# Altium PCB Устройство_Проверки_DI_DO_АКРОС_v1.0.PcbDoc
Units mm, origin at the board's own origin, x right, y up, seen from the top; angles counter-clockwise.
Board outline 74.8 x 46.2 mm, 2 copper layers (Top Layer, Bottom Layer), stack 1.571 mm thick; 24 components, 18 nets, 93 pads, 111 vias.
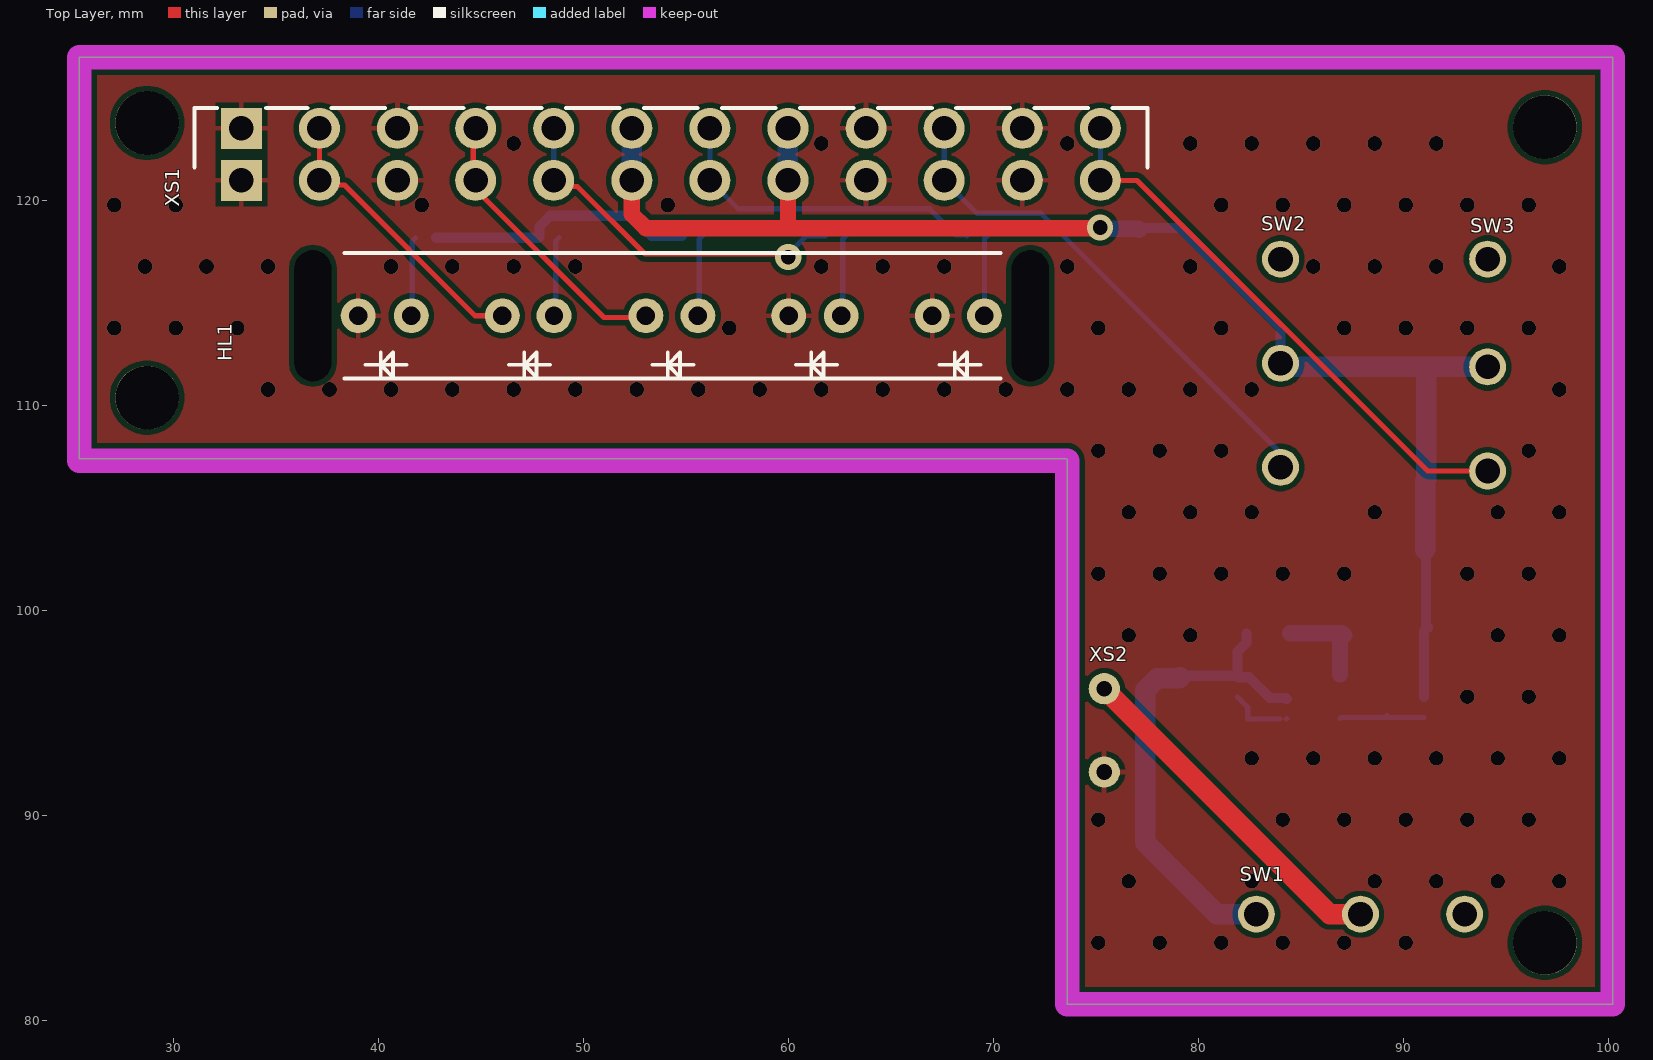
[diagram p0: Top Layer view]
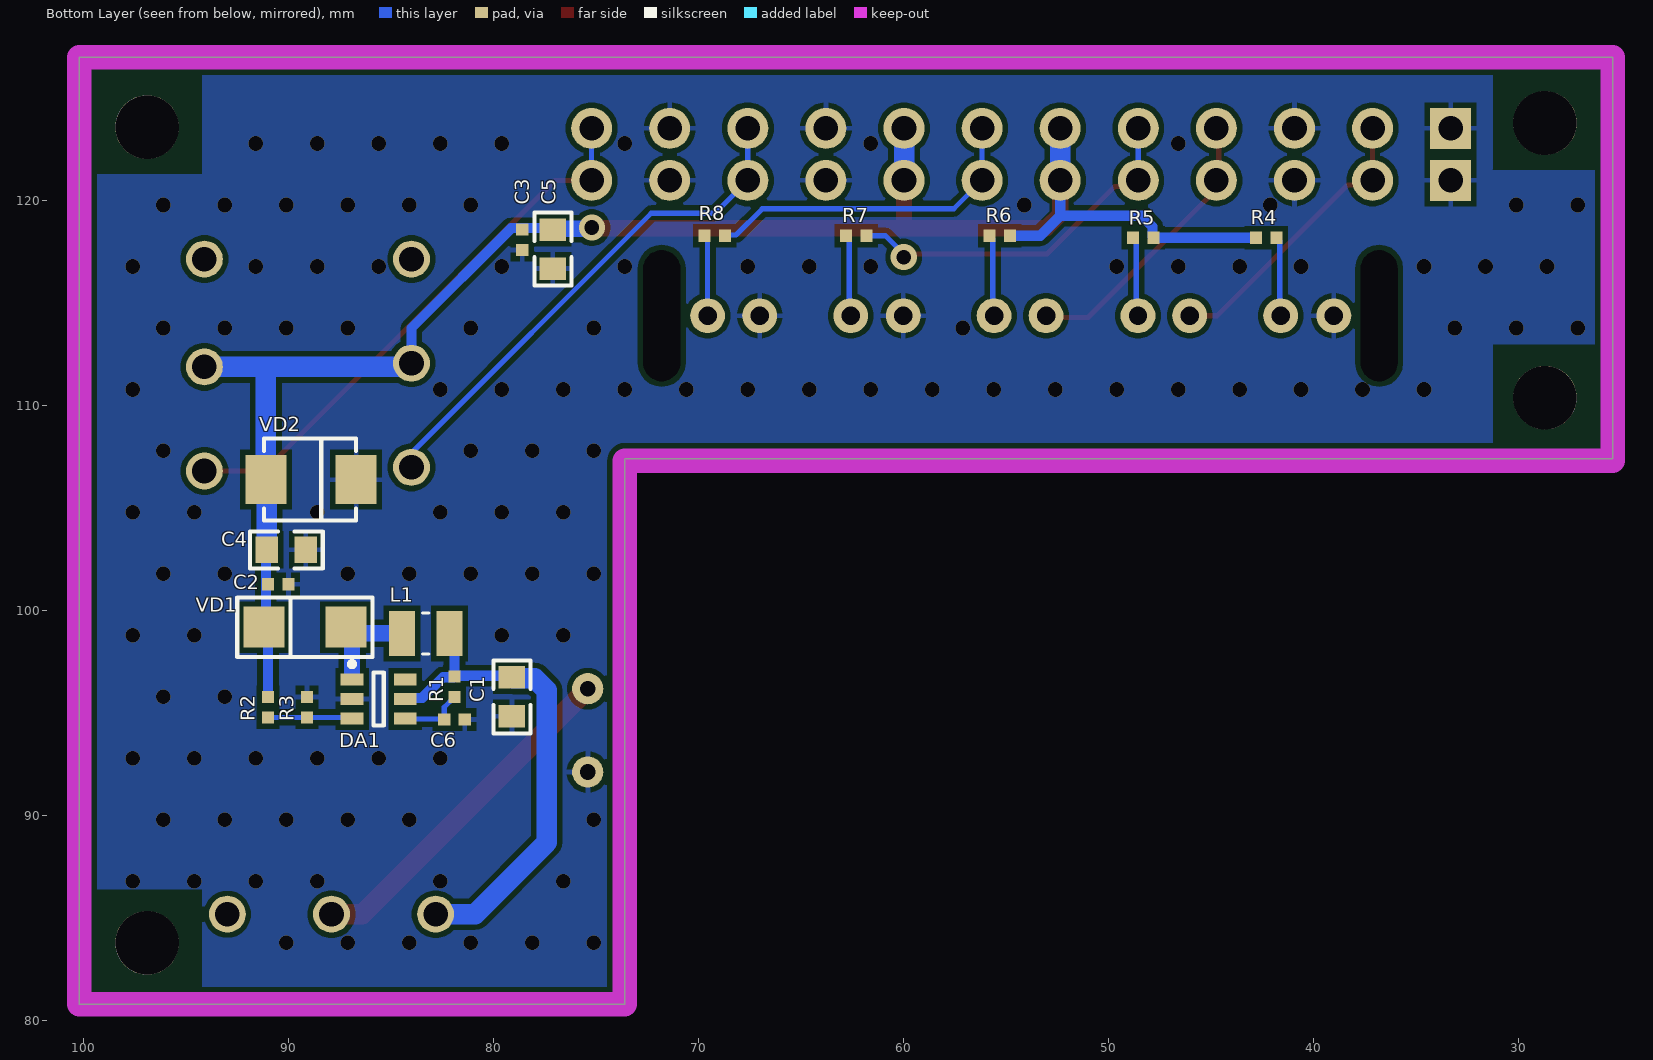
[diagram p1: Bottom Layer view, seen from below]
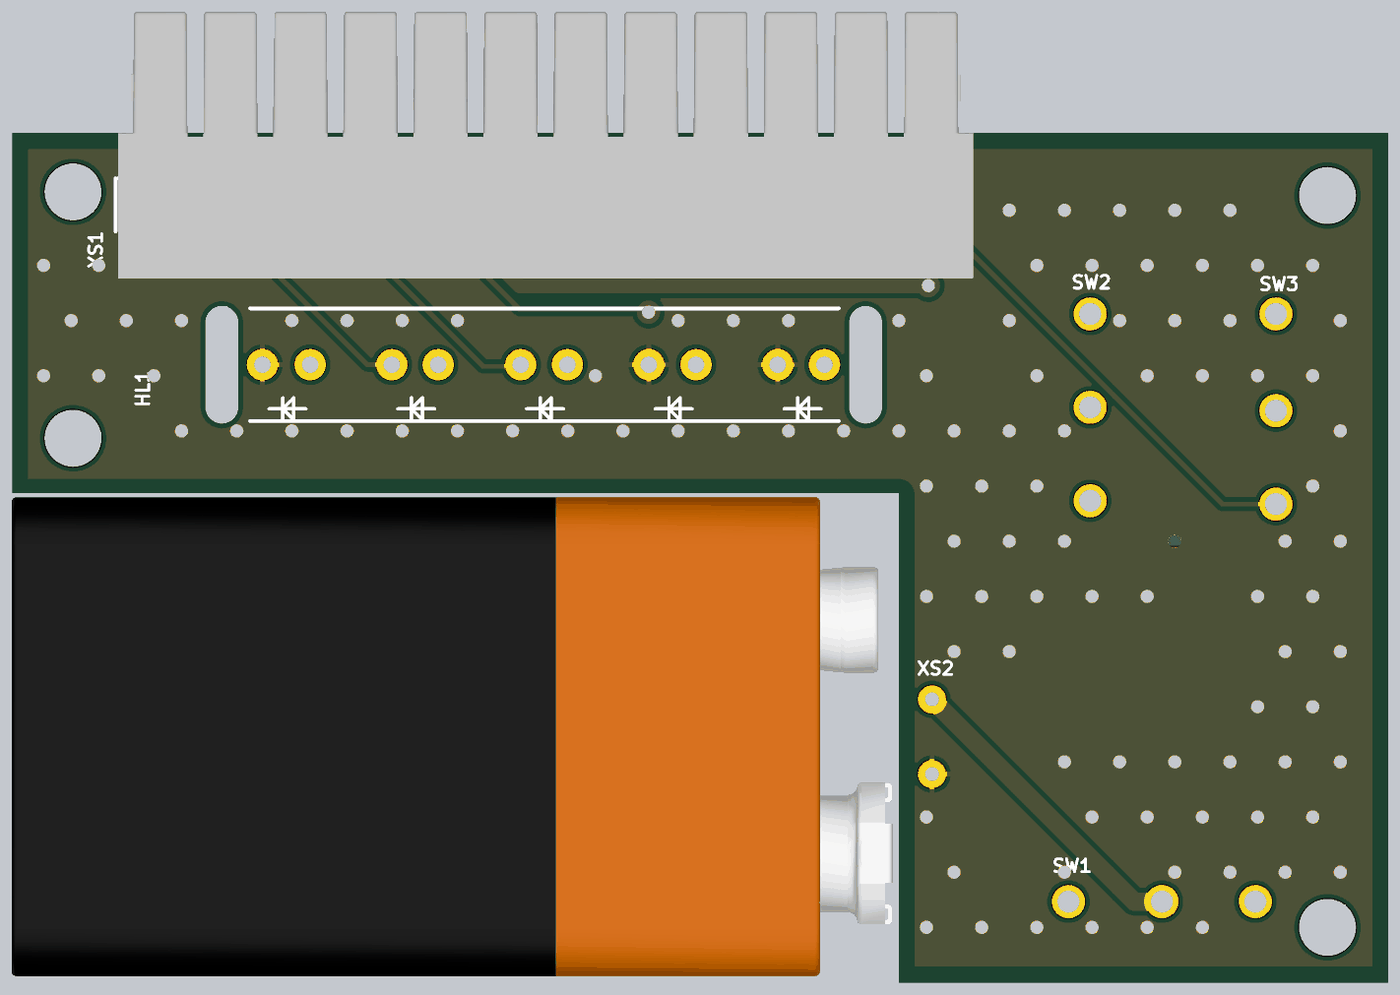
[diagram p2: 3D render of the assembled board from above, using the file's embedded part models]
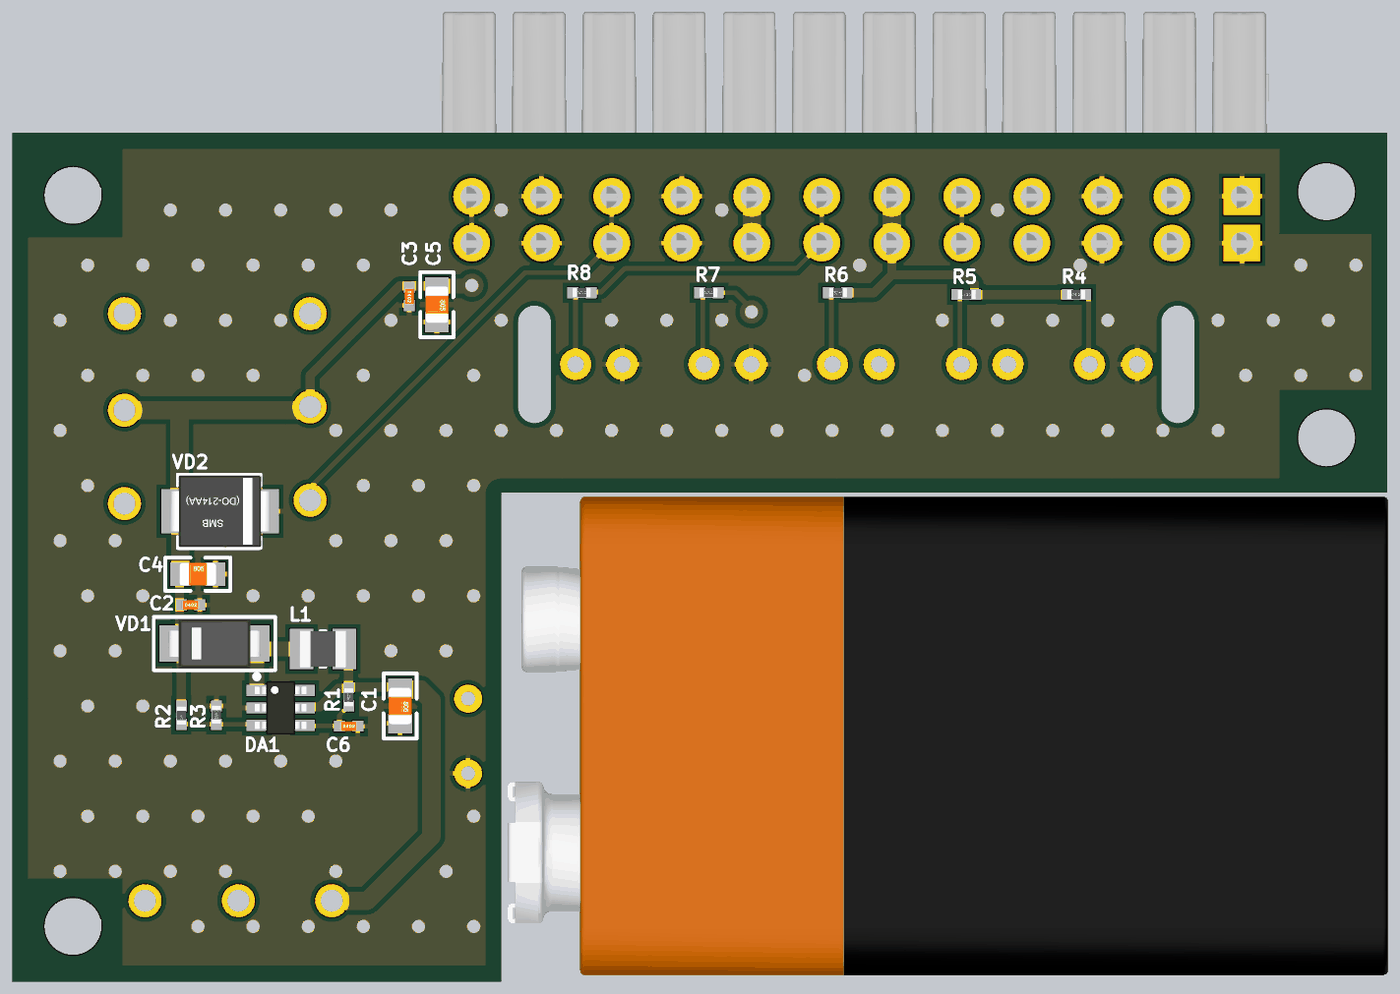
[diagram p3: 3D render of the assembled board from below, using the file's embedded part models]

## Layer stack, top to bottom
Top Solder: solder mask 0.0102, Solder Resist, Dk 3.5
Top Layer: signal copper 0.0356
Dielectric 1: dielectric 1.5, FR-4, Dk 4.8
Bottom Layer: signal copper 0.0356
Bottom Solder: solder mask 0.0102, Solder Resist, Dk 3.5

## Board outline
25.4,107.432 73.6,107.432 73.6,80.8 73.7,80.8 100.2,80.8 100.2,127 25.4,127

## Design rules (kind name [scope] priority, off if disabled: settings)
Clearance Clearance_2 [All] p1: gap=0.254 ignorepadtopadclearanceinfootprint=FALSE except(0: Arc-Hole Track-Hole SMDPad-Hole THPad-Hole Via-Hole Fill-Hole Poly-Hole Region-Hole Text-Hole)
Clearance Clearance_1 [All] p2: gap=0.254 ignorepadtopadclearanceinfootprint=FALSE except(0: Arc-Hole Track-Hole SMDPad-Hole THPad-Hole Via-Hole Fill-Hole Poly-Hole Region-Hole Text-Hole)
Clearance [All] p3: gap=0.254 ignorepadtopadclearanceinfootprint=FALSE except(0: Arc-Hole Track-Hole SMDPad-Hole THPad-Hole Via-Hole Fill-Hole Poly-Hole Region-Hole Text-Hole)
Height [All] p1: minheight=0 maxheight=35.4 prefheight=12.7
HoleSize [All] p1: absolutevalues=TRUE maxlimit=13.1 minlimit=0.3 maxpercent=80.000 minpercent=20.000
MinimumSolderMaskSliver [All] p1: minsoldermaskwidth=0.1
PolygonConnect [All] p1: thpad.connectstyle=Relief thpad.reliefconductorwidth=0.254 thpad.reliefentries=4 thpad.polygonreliefangle="90 Angle" thpad.airgapwidth=0.254 smdpad.connectstyle=Relief smdpad.reliefconductorwidth=0.254 smdpad.reliefentries=4 smdpad.polygonreliefangle="90 Angle" smdpad.airgapwidth=0.254 via.connectstyle=Direct via.reliefconductorwidth=0.254 via.reliefentries=4 via.polygonreliefangle="90 Angle" via.airgapwidth=0.254
RoutingVias [All] p1: holewidth=0.711 width=1.27 viastyle="Through Hole" minholewidth=0.711 minwidth=1.27 maxholewidth=0.711 maxwidth=1.27
SolderMaskExpansion [All] p1: expansion=0.065 istentingtop=FALSE
UnRoutedNet [All] p1: checkbadconnections=TRUE
ViasUnderSMD [All] p1: allowed=FALSE
Width [All] p1: maxlimit=1 minlimit=0.254 preferedwidth=0.254 minimp=50.000000 maximp=50.000000 favimp=50.000000
26 further rules are at their usual default settings.

## Components (designator, comment, footprint, x,y, rotation, side; value= is the part's Value field where it differs from the comment)
C1 "10мк" "CAP: 0805" 79.1,95.8 r270 bottom
C2 "0,1мк" "CAP: 0402" 90.5,101.3 r180 bottom
C3 "0,1мк" "CAP: 0402" 78.6,118.1 r270 bottom
C4 "10мк" "CAP: 0805" 90.104,102.973 r180 bottom
C5 "10мк" "CAP: 0805" 77.1,117.65 r270 bottom
C6 "0,1мк" "CAP: 0402" 81.9,94.7 r180 bottom
DA1 "BL8042DCB6TR" SOT23-6 85.6,95.7 r180 bottom
HL1 "HLA" L-914GDT 39,114.4 r0 top
L1 "CVM252009-4R7M" "IND: 1008" 83.3,98.9 r180 bottom
R1 "100к" "RES: 0402" 81.9,96.3 r90 bottom
R2 "75к" "RES: 0402" 91,95.3 r90 bottom
R3 "3к" "RES: 0402" 89.1,95.3 r270 bottom
R4 "1.5k" "RES: 0402" 42.3,118.2 r180 bottom
R5 "1.5k" "RES: 0402" 48.3,118.2 r0 bottom
R6 "1.5k" "RES: 0402" 55.3,118.3 r0 bottom
R7 "1.5k" "RES: 0402" 62.3,118.3 r180 bottom
R8 "1.5k" "RES: 0402" 69.2,118.3 r180 bottom
SW1 "Button-kcd11-102" "BUT: kcd11-102"#1 92.98,85.2 r180 top
SW2 "Button-kcd11-102" "BUT: kcd11-102"#1 84,117.16 r270 top
SW3 "Button-kcd11-102" "BUT: kcd11-102"#2 94.1,116.98 r270 top
VD1 "15MQ040" "DIODE: SMA" 89.2,99.2 r0 bottom
VD2 "SMBJ24CA" "DIODE: SMB" 88.9,106.4 r180 bottom
XS1 "15EDGA-3.81-12P" "CON: 15EDGA-3.81-12P" 33.3,123.54 r0 top
XS2 "XS?" "BAT: Krona" 75.527,94.168 r270 top

## Footprints (in the part's own frame and the unit in brackets; to place one, negate y for a bottom-side part, rotate by r counter-clockwise, add the part's x,y. Pads: shape width x height; smd on the part's side, far side on the other; paste and mask are expansions set on the pad)
"BAT: Krona" [mil]
  round 60 hole 30: 1(-80,-5) 2(80,-5)
  body extent -513,-1975 513,-90, height 531
"BUT: kcd11-102"#1 [mm]
  round 1.8 hole 1.2: 1(5.08,0) 2(0,0) 3(10.16,0)
"BUT: kcd11-102"#2 [mm]
  round 1.8 hole 1.2: 1(5.08,0) 2(-0.18,0) 3(10.16,0)
"CAP: 0402" [mm]
  rect 0.6x0.6 smd mask+0.065: 1(-0.5,0) 2(0.5,0)
  body extent -0.51,-0.25 0.51,0.25, height 0.51
"CAP: 0805" [mm]
  rect 1.1x1.3 smd mask+0.065: 1(-0.95,0) 2(0.95,0)
  silkscreen extent -1.78,-0.9 1.78,0.9, body extent -1,-0.62 1,0.63, height 0.78
"CON: 15EDGA-3.81-12P" [mm]
  rect 2x2 hole 1.2 mask+0.1: 1(0,-2.54) 1(0,0)
  round 2 hole 1.2 mask+0.1: 2(3.81,-2.54) 2(3.81,0) 3(7.62,-2.54) 3(7.62,0) 4(11.43,-2.54) 4(11.43,0) 5(15.24,-2.54) 5(15.24,0) 6(19.05,-2.54) 6(19.05,0) 7(22.86,-2.54) 7(22.86,0) 8(26.67,-2.54) 8(26.67,0) 9(30.48,-2.54) 9(30.48,0) 10(34.29,-2.54) 10(34.29,0) 11(38.1,-2.54) 11(38.1,0) 12(41.91,-2.54) 12(41.91,0)
  silkscreen extent -2.28,-1.9 44.2,1, body extent -2.16,-4.44 44.35,10.05, height 7.18
"DIODE: SMA" [mm]
  rect 2x2 smd mask+0.065: 1(-2,0) 2(2,0)
  round 0.5 on Mech1: ""(2,0.9)
  silkscreen extent -3.3,-1.45 3.3,1.45, body extent -2.5,-1.35 2.5,1.35, height 2.28
"DIODE: SMB" [mm]
  rect 2x2.4 smd mask+0.065: 1(-2.2,0) 2(2.2,0)
  silkscreen extent -2.3,-2 2.2,2, body extent -2.75,-1.95 2.75,1.95, height 2.45
"IND: 1008" [mm] "Chip Inductor, 2-Leads, Body 2,50x2,00mm, IPC Medium Density"
  rect 1.27x2.2 smd: 1(-1.165,0) 2(1.165,0)
  silkscreen extent -0.15,-1 0.15,1, body extent -1.27,-1.02 1.27,1.02, height 1.1
L-914GDT [mm]
  rect 0x0 hole 1.8 slot 6.4 at 90 deg unplated mask+0.05: 0(-2.209,-0.002) 0(32.791,-0.002)
  round 1.7 hole 0.9 mask+0.05: 1(0,0) 2(2.593,0) 3(7.034,0) 4(9.553,0) 5(14.04,0) 6(16.577,0) 7(21.002,0) 8(23.571,0) 9(28.013,0) 10(30.553,0)
  silkscreen extent -0.67,-3.06 31.33,3.06, body extent -5.57,-2.75 36.13,2.55, height 16.3
"RES: 0402" [mm]
  rect 0.6x0.6 smd mask+0.065: 1(-0.5,0) 2(0.5,0)
  body extent -0.52,-0.25 0.48,0.25, height 0.34
SOT23-6 [mm] "pitch 0.95 mm"
  rect 1.1x0.6 smd: 1(-1.3,0.95) 2(-1.3,0) 3(-1.3,-0.95) 4(1.3,-0.95) 5(1.3,0) 6(1.3,0.95)
  round 0.5 on Mech1: ""(-1,1.1)
  silkscreen extent -1.43,-1.3 0.25,1.82, body extent -1.4,-1.45 1.4,1.45, height 1.45

## Part data
C1 C4 C5: library part Ceramic_0805, Наименование="0805 X5R 16В 10 мкФ ±10%", Примечание=SMD
C2 C3 C6: library part Ceramic_0402, Наименование="0402 X7R 25В 0,1 мкФ ±10%", Примечание=SMD
DA1: "Boost converter", Наименование=BL8032CB6TR, Примечание=SMD
HL1: library part L-914GDT
L1: library part CVM252009, Наименование=CVM252009-4R7M, Примечание=SMD
R1 R2 R3 R4 R5 R6 R7 R8: library part Resistor_0402, Наименование="0402 100 кОм ±1%", Примечание=SMD
VD1: library part Schottky_single, Наименование=MBR0520, Примечание=SMD
VD2: library part TVS_single, Наименование=1N4148, Примечание=SMD
XS1: library part "CONNECTOR-12 - 3,81mm"
XS2: library part Connector_Krona

## Free pads (board coordinates)
  round 3.1 hole 3.1 unplated: 2(28.7,110.4) 2(28.7,123.8) 2(96.9,83.8) 2(96.9,123.6)

## Via types
v1: diameter 0.711, hole 0.711, Top Layer to Bottom Layer, tented both sides, 109 vias
v2: diameter 1.27, hole 0.711, Top Layer to Bottom Layer, tented both sides, 2 vias

## Nets (pads, with @x,y where several pads share a name; then routed paths per layer and width w, separated by ;. In a path a pad name is that pad's centre, name@x,y a point inside that pad or via, vN(x,y) a via of type N, cw(c..) or ccw(c..) an arc to the next point about the centre after c; other vN are vias at no path point)
+9V: SW1.1 XS2.1 | length 17.1
  Top Layer w1: XS2.1 86.4,85.2 SW1.1
+15V: C2.1 C3.1 C4.1 C5.1 R2.2 R4.1 R5.1 R6.1 SW2.1 SW3.1 VD1.2 VD2.1 XS1.6 XS1.8 | length 86.3
  Top Layer w0.254: 59.97,118.673 60,118.643
  Top Layer w0.8: XS1.6@52.35,121 52.35,119.35 53.027,118.673 59.97,118.673 ; XS1.8@59.97,121 59.97,118.673 ; v2@75.2,118.673 59.97,118.673 ; SW2.1 SW2.1@84,112.3
  Bottom Layer w0.5: R4.1 R5.1 47.85,118.25 47.85,118.75 48.374,119.274 52.35,119.274 ; XS1.6@52.35,121 52.35,119.274 ; R6.1 53.324,118.3 52.35,119.274 ; C5.1@77.1,118.673 79.127,118.673 84,113.8 SW2.1 ; R2.2 91,99 VD1.2 ; VD1.2@91.1,99.3 C2.1@91.1,101.3 ; C2.1@91.1,101.35 C4.1@91.1,103
  Bottom Layer w0.8: v2(75.2,118.7) 75.25,118.65 77.05,118.65 C5.1
  Bottom Layer w1: XS1.6@52.35,121 XS1.6@52.35,123.54 ; XS1.8@59.97,121 XS1.8@59.97,123.54 ; SW2.1@83.7,111.9 91.1,111.9 ; C4.1 VD2.1@91.054,106.354 ; VD2.1 91.1,111.9 ; SW3.1 91.1,111.9
DI1: SW3.3 XS1.12 | length 27.3
  Top Layer w0.254: XS1.12@75.21,121 77,121 91.18,106.82 SW3.3
  Bottom Layer w0.254: XS1.12@75.21,121 XS1.12@75.21,123.54
DI2: SW2.3 XS1.10 | length 24.3
  Bottom Layer w0.254: XS1.10@67.59,123.54 67.59,121 69.19,119.4 72.3,119.4 SW2.3@83.9,107.8
DO1: R8.2 XS1.7 | length 16.2
  Bottom Layer w0.254: XS1.7@56.16,123.54 56.16,121 57.541,119.619 66.881,119.619 68.168,118.332 68.668,118.332 R8.2
DO2: R7.2 XS1.5 | length 17.9
  Top Layer w0.254: XS1.5@48.54,121 48.833,120.707 49.693,120.707 52.989,117.411 59.826,117.411 v2(59.983,117.254)
  Bottom Layer w0.254: XS1.5@48.54,121 XS1.5@48.54,123.54 ; v2(59.983,117.254) 59.983,117.411 60.872,118.3 R7.2
DO3: HL1.5 XS1.4 | length 13.4
  Top Layer w0.254: XS1.4@44.618,123.263 44.618,121.982 XS1.4@45.165,121.435 ; XS1.4@44.73,121 44.73,120.57 50.99,114.31 52.95,114.31 HL1.5
DO4: HL1.3 XS1.2 | length 14.5
  Top Layer w0.254: XS1.2@37.11,123.54 37.11,121 37.338,120.772 38.328,120.772 44.7,114.4 45.656,114.4 HL1.3@46.131,113.926
GND: C1.2 C2.2 C3.2 C4.2 C5.2 C6.2 DA1.2 HL1.1 HL1.7 HL1.9 R3.1 VD2.2 XS1.1 XS1.3 XS1.9 XS1.11 XS2.2
  other v1: 75.1,83.8 78.1,83.8 81.1,83.8 84.1,83.8 87.1,83.8 90.1,83.8 76.6,86.8 82.6,86.8 88.6,86.8 91.6,86.8 94.6,86.8 97.6,86.8 75.1,89.8 84.1,89.8 87.1,89.8 90.1,89.8 93.1,89.8 96.1,89.8 82.6,92.8 85.6,92.8 88.6,92.8 91.6,92.8 94.6,92.8 97.6,92.8 93.1,95.8 96.1,95.8 76.6,98.8 79.6,98.8 94.6,98.8 97.6,98.8 75.1,101.8 78.1,101.8 81.1,101.8 84.1,101.8 87.1,101.8 93.1,101.8 96.1,101.8 76.6,104.8 79.6,104.8 82.6,104.8 88.6,104.8 94.6,104.8 97.6,104.8 75.1,107.8 78.1,107.8 81.1,107.8 96.1,107.8 34.6,110.8 37.6,110.8 40.6,110.8 43.6,110.8 46.6,110.8 49.6,110.8 52.6,110.8 55.6,110.8 58.6,110.8 61.6,110.8 64.6,110.8 67.6,110.8 70.6,110.8 73.6,110.8 76.6,110.8 79.6,110.8 82.6,110.8 97.6,110.8 27.1,113.8 30.1,113.8 33.1,113.8 57.1,113.8 75.1,113.8 81.1,113.8 87.1,113.8 90.1,113.8 93.1,113.8 96.1,113.8 28.6,116.8 31.6,116.8 34.6,116.8 40.6,116.8 43.6,116.8 46.6,116.8 49.6,116.8 61.6,116.8 64.6,116.8 67.6,116.8 73.6,116.8 79.6,116.8 85.6,116.8 88.6,116.8 91.6,116.8 97.6,116.8 27.1,119.8 30.1,119.8 42.1,119.8 54.1,119.8 81.1,119.8 84.1,119.8 87.1,119.8 90.1,119.8 93.1,119.8 96.1,119.8 46.6,122.8 61.6,122.8 73.6,122.8 79.6,122.8 82.6,122.8 85.6,122.8 88.6,122.8 91.6,122.8
NetC6_1: C6.1 DA1.4 R1.1 | length 2.8
  Bottom Layer w0.254: R1.1 82.4,95.3 C6.1 ; C6.1@82.525,94.725 DA1.4@83.975,94.725 ; DA1.4@84.275,94.725 DA1.4
NetDA1_1: DA1.1 L1.1 VD1.1 | length 4.6
  Bottom Layer w0.8: L1.1 87,98.9 VD1.1@87.1,98.8 ; DA1.1@86.9,96.9 VD1.1@86.9,98.8
NetDA1_3: DA1.3 R2.1 R3.2 | length 4.3
  Bottom Layer w0.254: DA1.3 86.95,94.8 R3.2@89.208,94.8 ; R3.2@89.125,94.825 89.2,94.9 89.3,94.8 R2.1
NetHL1_2: HL1.2 R4.2 | length 4.5
  Bottom Layer w0.254: HL1.2 41.639,114.446 41.639,118.039 R4.2 ; HL1.2@41.808,114.408 41.816,114.4 HL1.2@41.816,113.8
NetHL1_4: HL1.4 R5.2 | length 3.9
  Bottom Layer w0.254: HL1.4 48.636,114.483 48.636,118.036 R5.2
NetHL1_6: HL1.6 R6.2 | length 4
  Bottom Layer w0.254: HL1.6 55.638,114.46 55.638,118.138 R6.2
NetHL1_8: HL1.8 R7.1 | length 4
  Bottom Layer w0.254: HL1.8 62.641,114.471 62.641,118.141 R7.1
NetHL1_10: HL1.10 R8.1 | length 4
  Bottom Layer w0.254: HL1.10 69.552,118.152 R8.1
ON: C1.1 DA1.5 L1.2 R1.2 SW1.3 | length 23.9
  Bottom Layer w0.5: C1.1@79.379,96.829 R1.2@81.871,96.829 ; L1.2@82.335,98.9 82.335,98.435 81.9,98 R1.2 81.937,96.762 82.462,96.762 83.475,95.75 84.25,95.75 DA1.5
  Bottom Layer w1: C1.1 79.05,96.7 77.986,96.7 77.4,96.114 77.4,88.7 80.9,85.2 SW1.3
pads on no net: DA1. DA1.6 HL1.0 SW1.2 SW2.2 SW3.2 VD1.

## Polygon pours and split planes (outlines as drawn)
GND on Top Layer "GND_L01_P000" (solid, pour order 0): 25.4,127 100.2,127 100.2,80.8 73.6,80.8 73.6,107.415 73.583,107.432 73.581,107.43 25.4,107.43 25.4,127
GND on Bottom Layer "GND_L02_P001" (solid, pour order 1): 25.4,127 100.2,127 100.2,80.8 73.6,80.8 73.6,107.43 73.598,107.432 25.401,107.432 25.4,107.431

## Keep-outs
Keep-Out Layer:
  lines w1.2: 25.4,107.332 73.6,107.332 73.6,80.8 ; 25.4,107.432 25.4,127 100.2,127 100.2,80.8 73.6,80.8 ; 73.7,80.8 73.6,80.8

## Other copper
Bottom Layer:
  pour cut-out: 31.3,121.5 26,121.5 26,126.4 26.014,126.414 31.259,126.414 31.259,121.541
  pour cut-out: 31.3,108.1 26,108.1 26,113 26.014,113.014 31.259,113.014 31.259,108.141
  pour cut-out: 99.5,81.5 94.2,81.5 94.2,86.4 94.214,86.414 99.459,86.414 99.459,81.541
  pour cut-out: 99.5,121.3 94.2,121.3 94.2,126.2 94.214,126.214 99.459,126.214 99.459,121.341

## Silkscreen, mask and mechanical layers (free items; w line width, h text height)
Top Overlay:
  lines w0.18: 39.359,112 41.359,112 ; 40.1,111.4 40.1,112.6 ; 40.159,111.941 40.7,111.4 40.7,112.6 40.159,112.059 ; 46.359,112 48.359,112 ; 47.1,111.4 47.1,112.6 ; 47.159,111.941 47.7,111.4 47.7,112.6 47.159,112.059 ; 53.359,112 55.359,112 ; 54.1,111.4 54.1,112.6 ; 54.159,111.941 54.7,111.4 54.7,112.6 54.159,112.059 ; 60.359,112 62.359,112 ; 61.1,111.4 61.1,112.6 ; 61.159,111.941 61.7,111.4 61.7,112.6 61.159,112.059 ; 67.359,112 69.359,112 ; 68.1,111.4 68.1,112.6 ; 68.159,111.941 68.7,111.4 68.7,112.6 68.159,112.059 ; 40.4,112 40.4,112 ; 47.4,112 47.4,112 ; 54.4,112 54.4,112 ; 61.4,112 61.4,112 ; 68.4,112 68.4,112